# Altium PCB filtroBA.PcbDoc
Units mm, origin at the board's own origin, x right, y up, seen from the top; angles counter-clockwise.
Board outline 37 x 27 mm, 2 copper layers (Top Layer, Bottom Layer); 9 components, 5 nets, 18 pads, 0 vias.
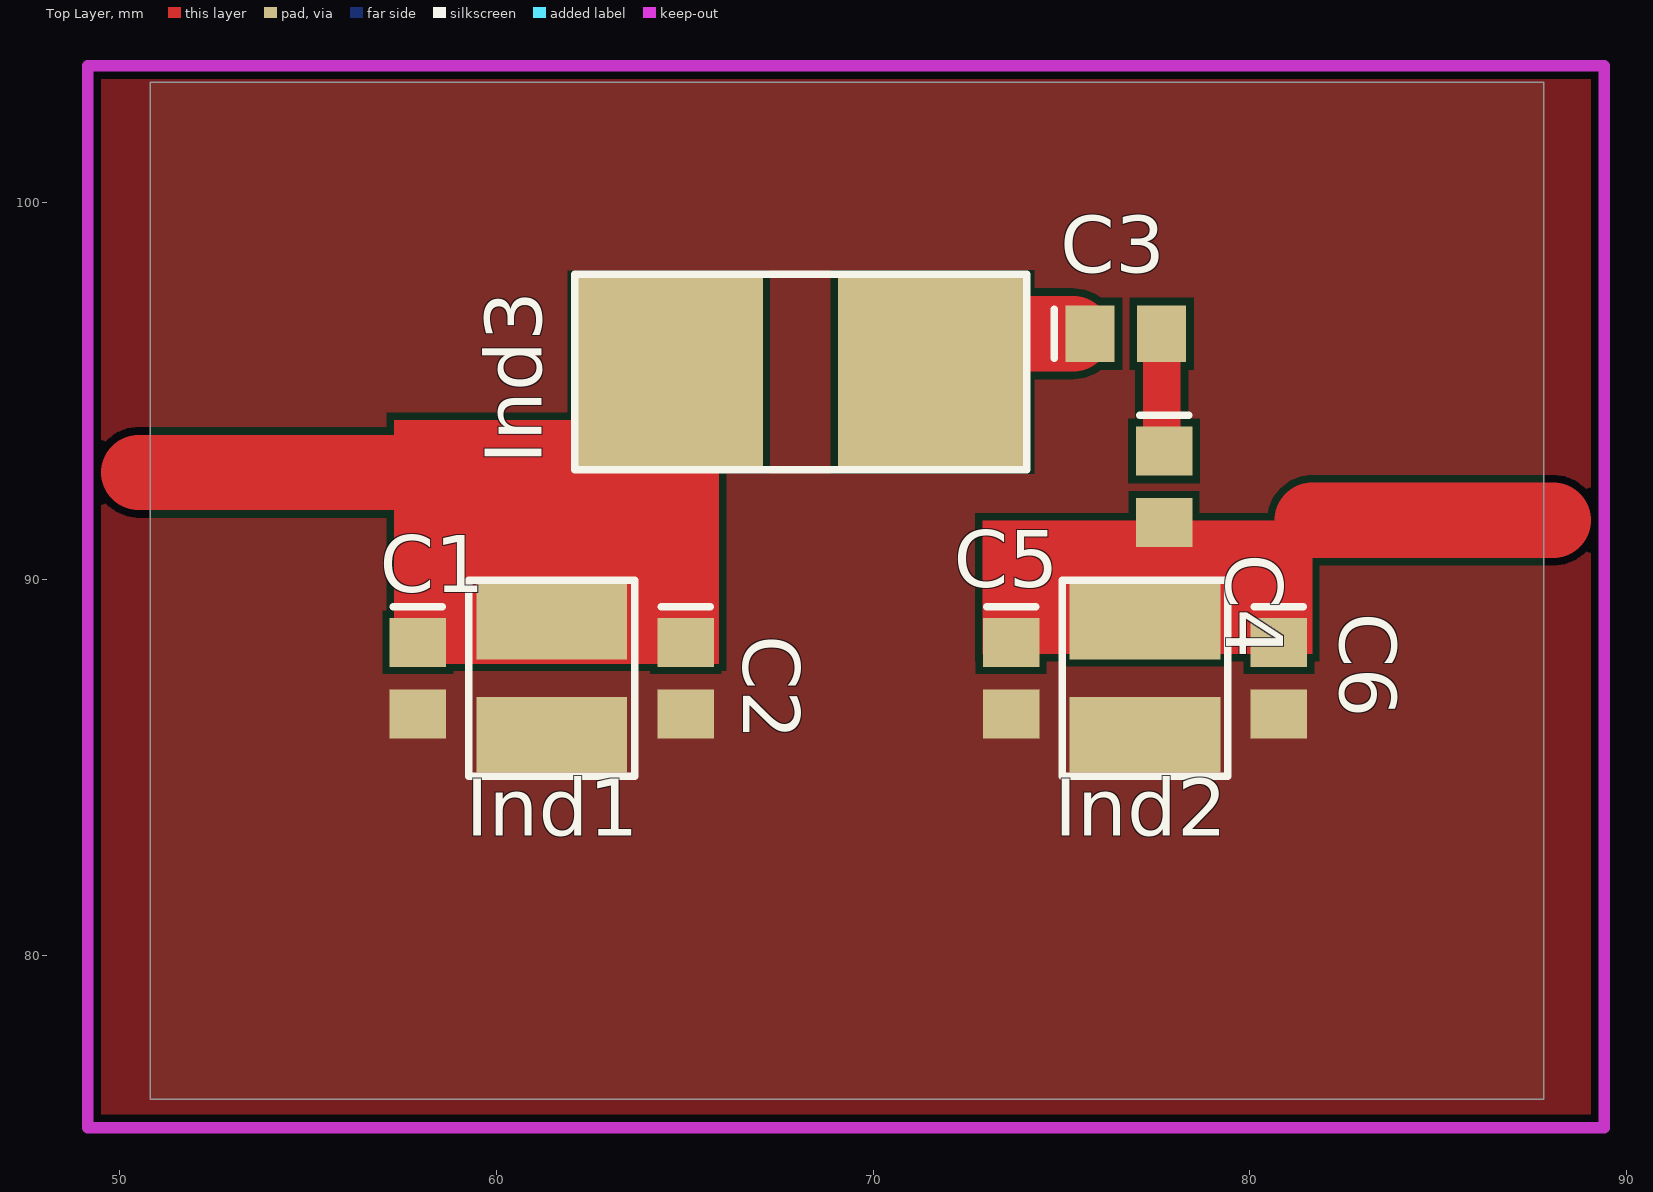
[diagram p0: Top Layer view]
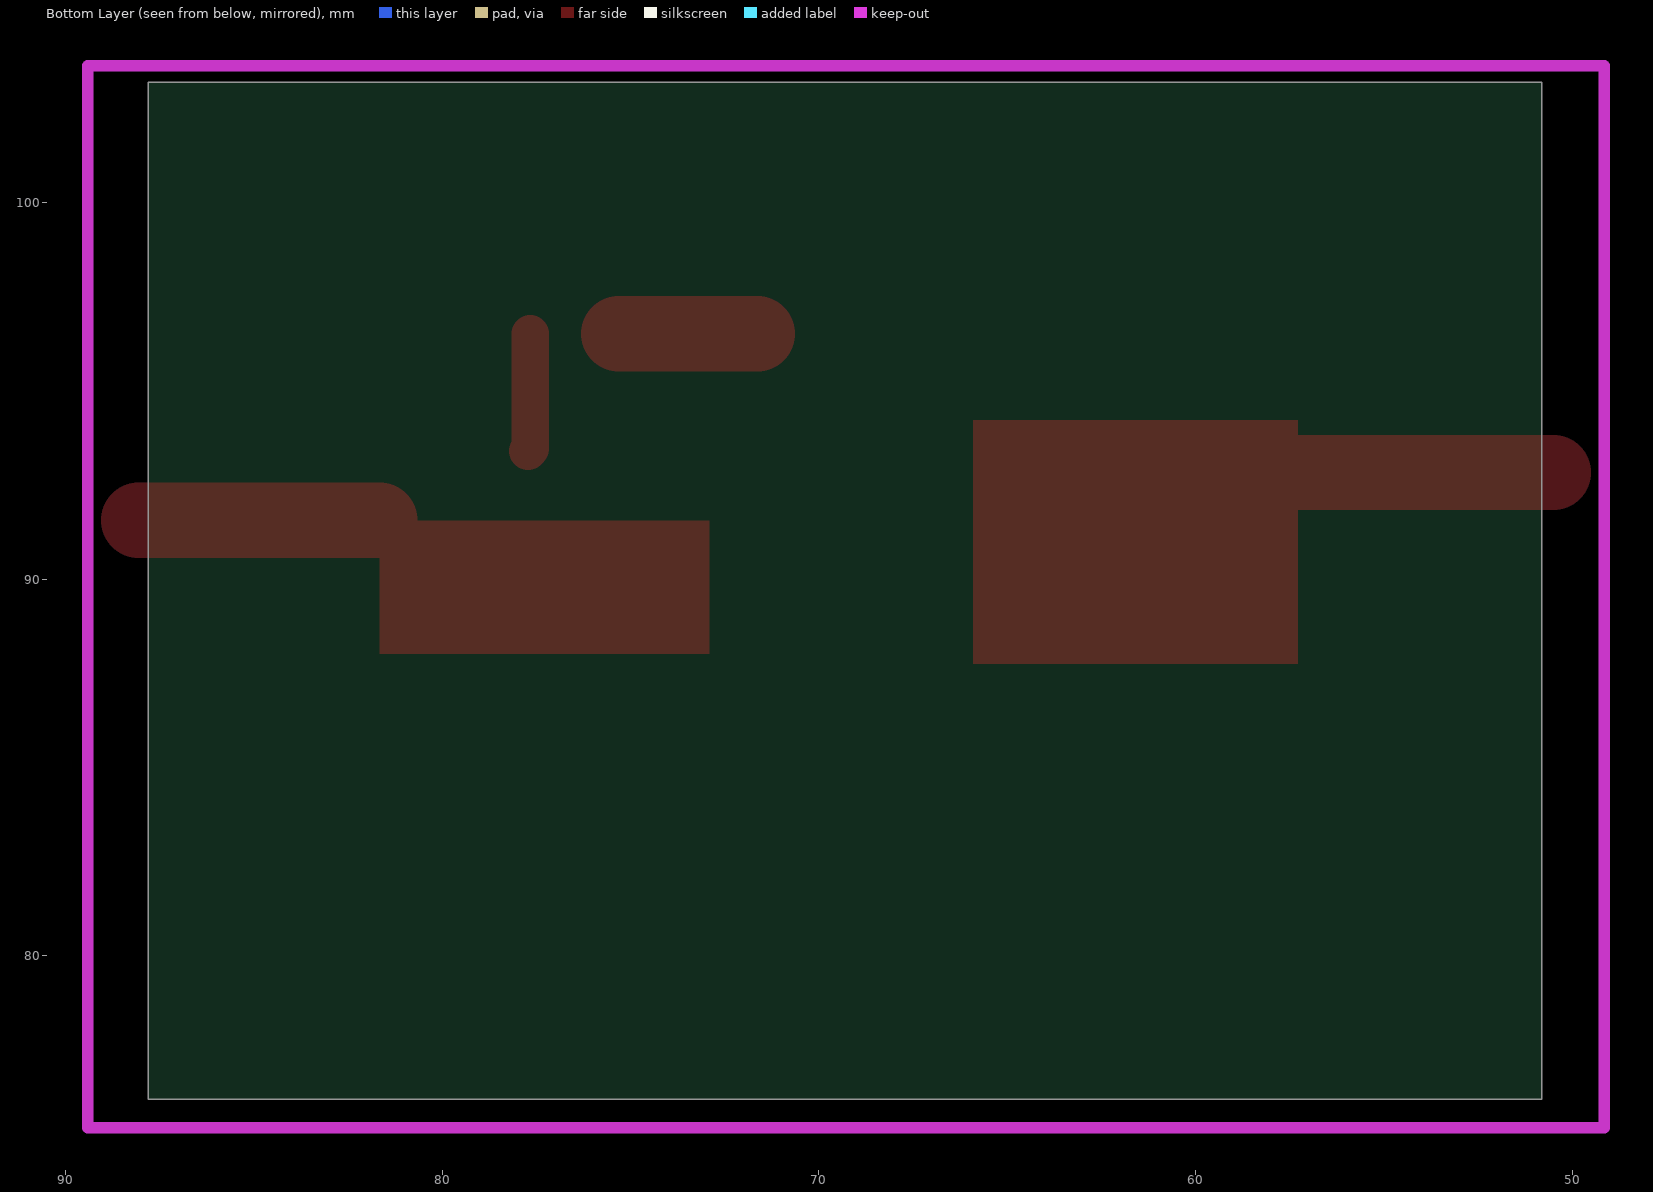
[diagram p1: Bottom Layer view, seen from below]

## Layer stack, top to bottom
Top Layer: signal copper 0.0356
Dielectric: dielectric 0.32, FR-4, Dk 4.8
Bottom Layer: signal copper 0.0356

## Board outline
50.8,76.2 87.8,76.2 87.8,103.2 50.8,103.2

## Design rules (kind name [scope] priority, off if disabled: settings)
Clearance [All] p1: gap=0.2
ComponentClearance [All] p1: gap=0.254 collisioncheckmode=3 verticalgap=0.254
PolygonConnect [All] p1: connectstyle=Direct reliefconductorwidth=0.254 reliefentries=4 polygonreliefangle="90 Angle"
RoomDefinition filtroBA [InComponentClass('filtroBA')] p1: confinementstyle=ConfineIn formatcopy=TRUE lockcomponents=FALSE outline 50.673,75.819 88.011,75.819 88.011,103.632 50.673,103.632
RoutingVias [All] p1: holewidth=0.6 width=1 viastyle="Through Hole" minholewidth=0.711 minwidth=0.6 maxholewidth=0.711 maxwidth=1.27
SolderMaskExpansion [All] p1: expansion=0.102
TestPointUsage [All] p1: valid=0 allowmultiple=FALSE
Testpoint [All] p1: side=15 testpointundercomponent=TRUE minsize=1.016 maxsize=2.54 preferedsize=1.524 minholesize=0 maxholesize=1.016 preferedholesize=0.813 testpointgrid=0.025 style=1023 order=0123456789
Width [All] p1: maxlimit=3 minlimit=0.2 preferedwidth=2
18 further rules are at their usual default settings.

## Components (designator, comment, footprint, x,y, rotation, side; value= is the part's Value field where it differs from the comment)
C1 "Cap Pol3" C0805 57.912,87.376 r270 top
C2 "Cap Pol3" C0805 65.024,87.376 r270 top
C3 "Cap Pol3" C0805 76.708,96.52 r0 top
C4 "Cap Pol3" C0805 77.724,92.456 r270 top
C5 "Cap Pol3" C0805 73.66,87.376 r270 top
C6 "Cap Pol3" C0805 80.772,87.376 r270 top
Ind1 "Ind2" Ind_3mm 61.468,87.376 r90 top
Ind2 "Ind2" Ind_3mm 77.216,87.376 r90 top
Ind3 "Ind2" IND_7MM 68.072,95.504 r180 top

## Footprints (in the part's own frame and the unit in brackets; to place one, negate y for a bottom-side part, rotate by r counter-clockwise, add the part's x,y. Pads: shape width x height; smd on the part's side, far side on the other; paste and mask are expansions set on the pad)
C0805 [mm] "Chip Capacitor; Body 2.0 x 1.2 mm (LxW typ)"
  rect 1.3x1.5 smd: 1(-0.95,0) 2(0.95,0)
  silkscreen extent -1.9,-0.65 -1.9,0.65
Ind_3mm [mm]
  rect 2x4 smd: 1(-1.5,0) 2(1.5,0)
  silkscreen extent -2.6,-2.2 2.6,2.2
IND_7MM [mm]
  rect 5x5 smd: 1(-3.5,0) 2(3.5,0)
  silkscreen extent -6,-2.6 6,2.6

## Part data
C1 C2 C3 C4 C5 C6: "Polarized Capacitor (Surface Mount)"

## Nets (pads, with @x,y where several pads share a name; then routed paths per layer and width w, separated by ;. In a path a pad name is that pad's centre, name@x,y a point inside that pad or via, vN(x,y) a via of type N, cw(c..) or ccw(c..) an arc to the next point about the centre after c; other vN are vias at no path point)
GND: C1.2 C2.2 C5.2 C6.2 Ind1.1 Ind2.1
IN: C1.1 C2.1 Ind1.2 Ind3.2 | length 7.2
  Top Layer w2: 50.499,92.837 57.658,92.837
NetC3_1: C3.1 Ind3.1 | length 3.7
  Top Layer w2: Ind3.1@71.628,96.52 C3.1@75.311,96.52
NetC3_2: C3.2 C4.1 | length 3.1
  Top Layer w1: C3.2 77.658,93.472 C4.1
OUT: C4.2 C5.1 C6.1 Ind2.2 | length 6.4
  Top Layer w2: 81.661,91.567 88.058,91.567

## Polygon pours and split planes (outlines as drawn)
GND on Top Layer (solid, remove dead copper): 48.387,105.029 48.387,73.406 91.821,73.406 91.821,104.902

## Keep-outs
Keep-Out Layer:
  lines w0.3: 49.149,75.438 49.149,103.632 89.408,103.632 89.408,75.438 49.149,75.438

## Other copper
Top Layer:
  rectangle net IN: 57.277,87.757 65.913,94.234
  rectangle net OUT: 72.898,88.011 81.661,91.567

## Silkscreen, mask and mechanical layers (free items; w line width, h text height)
Drill Drawing:
  text ".LEGEND" at 92.88,81.28 h1.52
  text "Drill Drawing." at 92.88,78.74 h1.52

## Dimensions
49.149,75.438 to 49.149,103.632 on Mechanical 1
49.149,75.438 to 89.408,75.438 on Mechanical 1